# Altium PCB JacdacBreadboardBc30Mount 134 flex-hack-panel.PcbDoc
Units mm, origin at the board's own origin, x right, y up, seen from the top; angles counter-clockwise.
Board outline 74 x 77 mm, 2 copper layers (Top Layer, Bottom Layer), stack 1.971 mm thick; 4 components, 0 nets, 4 pads, 0 vias.
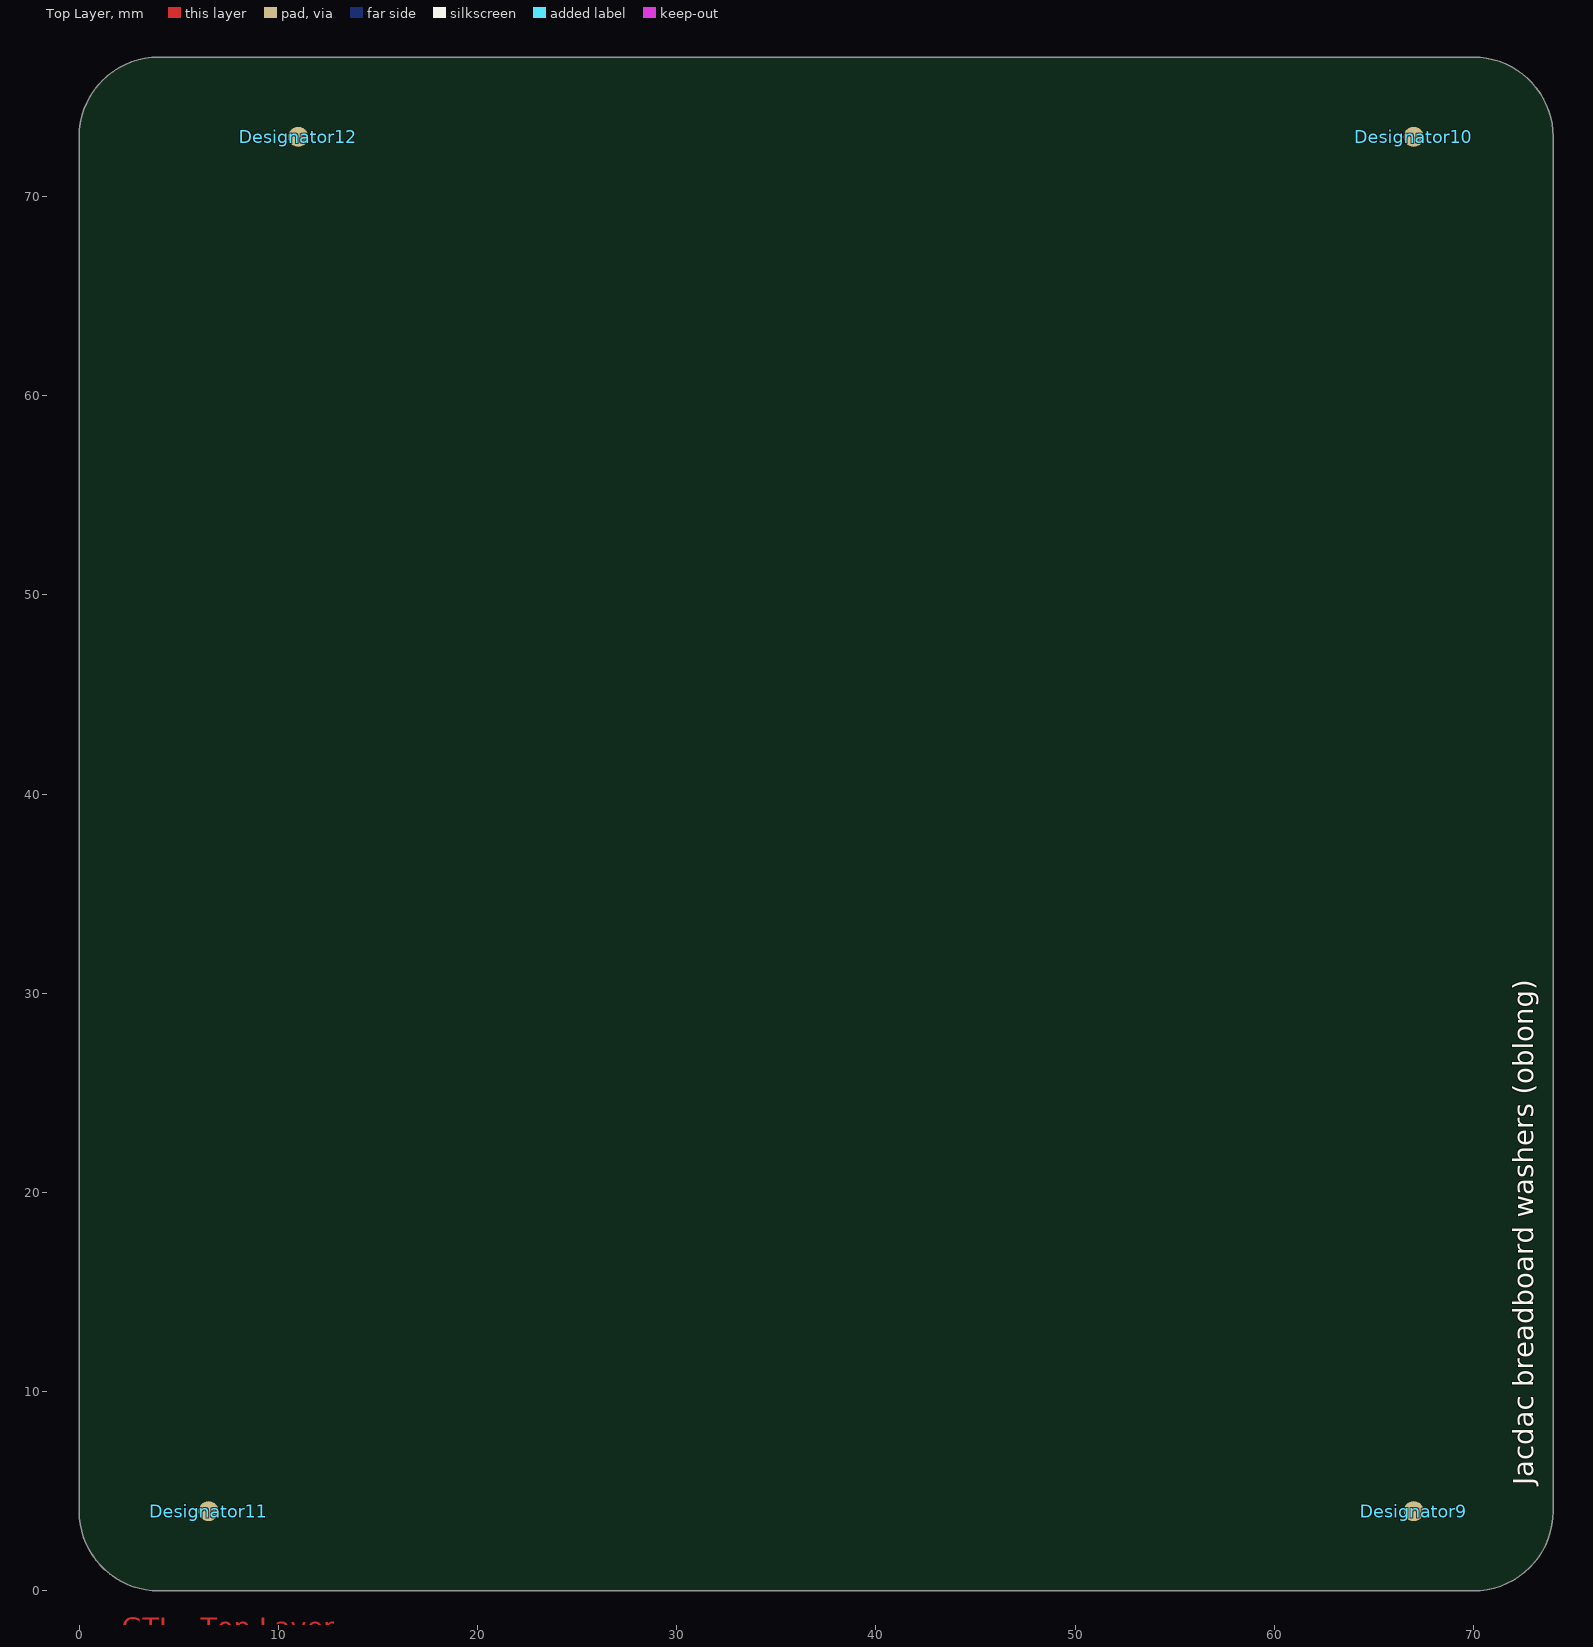
[diagram p0: Top Layer view]
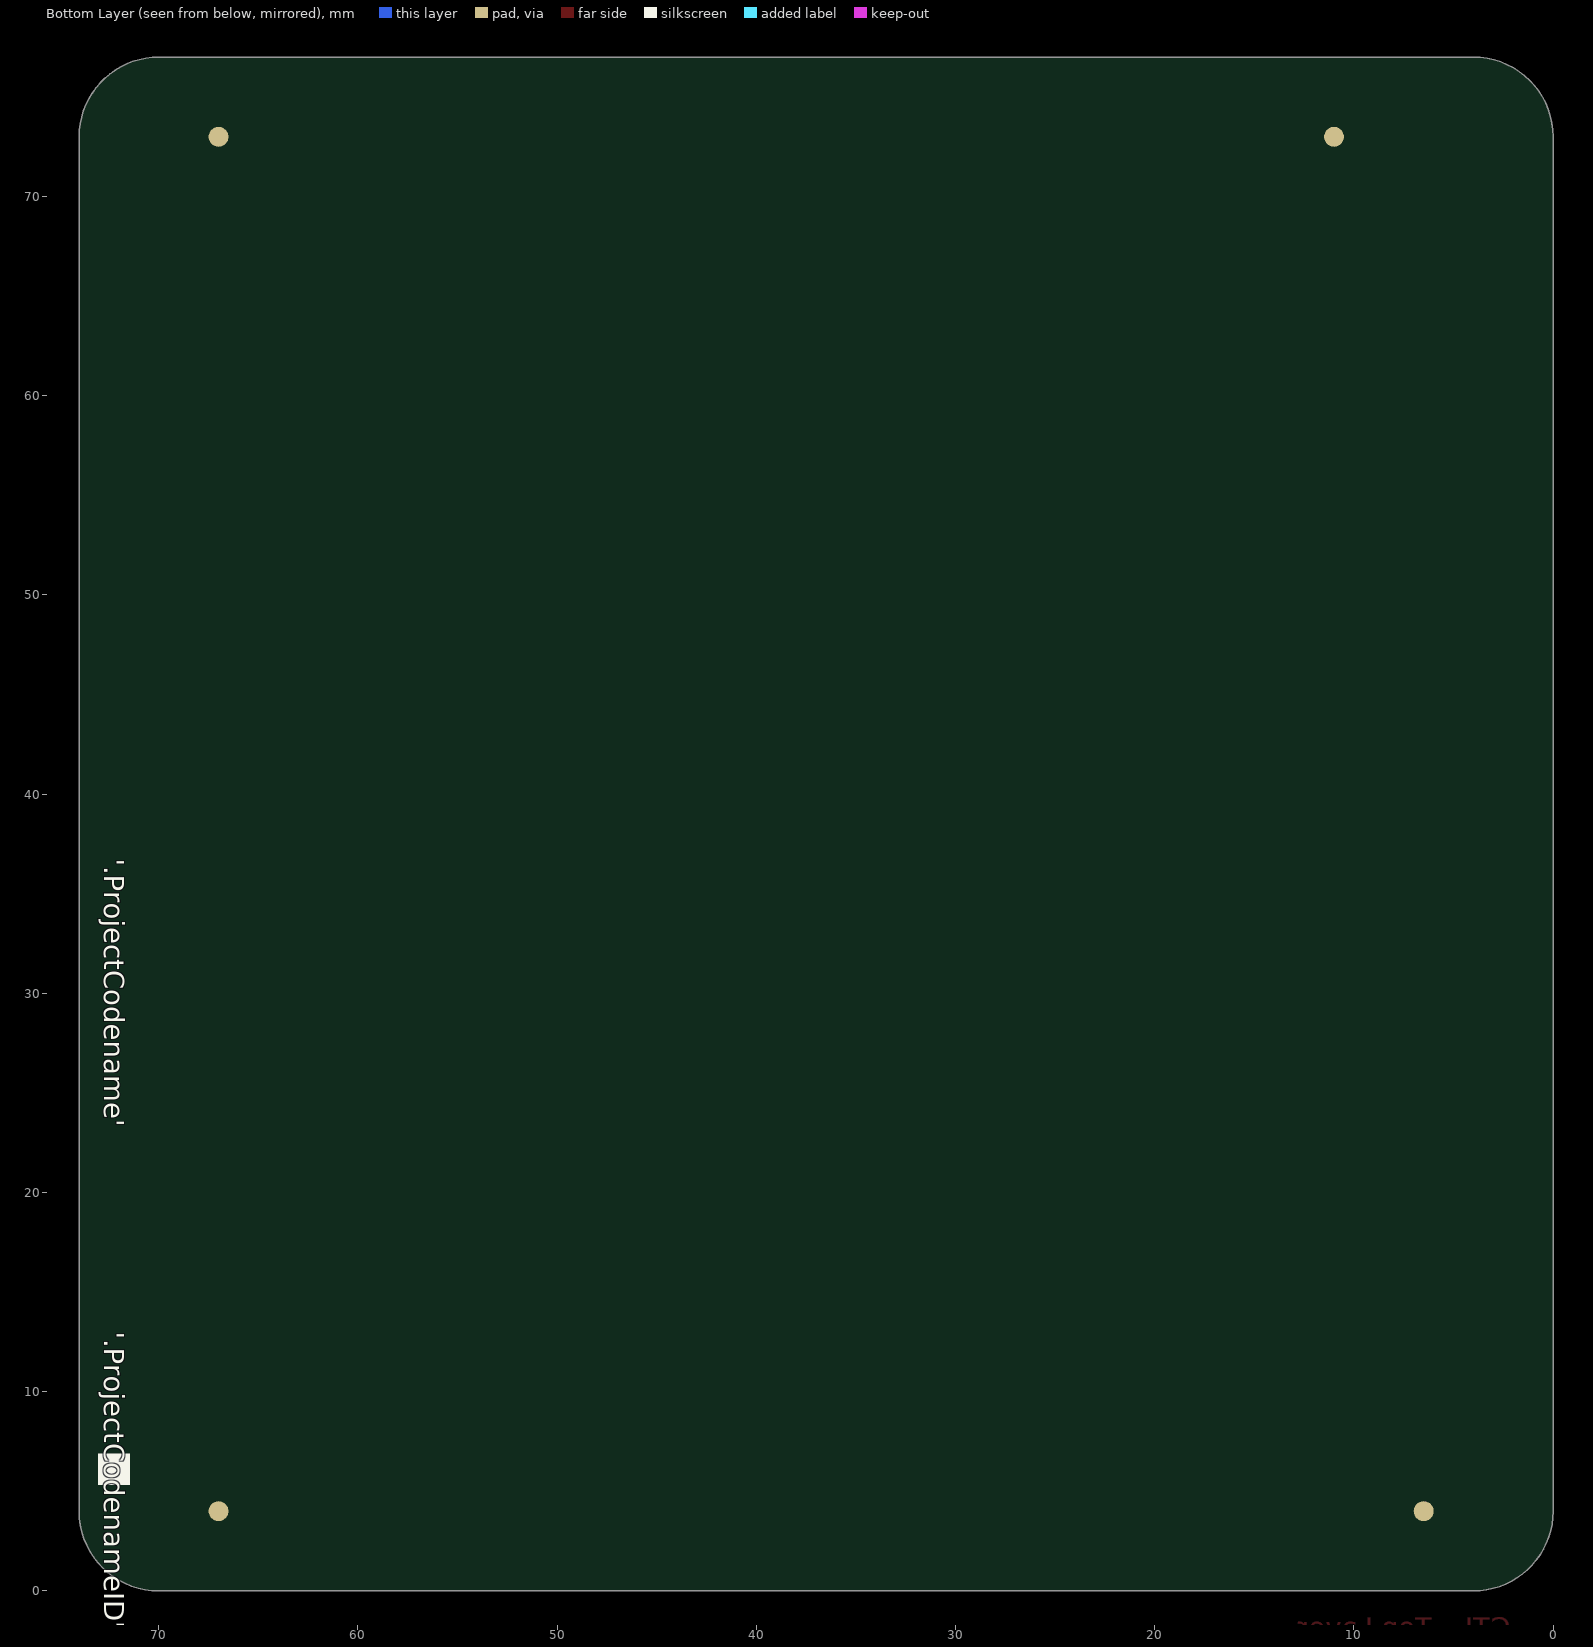
[diagram p1: Bottom Layer view, seen from below]

## Layer stack, top to bottom
Top Solder: solder mask 0.0102, Solder Resist, Dk 3.5
Top Layer: signal copper 0.0356
Dielectric 1: dielectric 1.9, FR-4, Dk 4.8
Bottom Layer: signal copper 0.0356
Bottom Solder: solder mask 0.0102, Solder Resist, Dk 3.5

## Board outline
0,4 ccw(c4,4) 4,0 70,0 ccw(c70,4) 74,4 74,73 ccw(c70,73) 70,77 4,77 ccw(c4,73) 0,73
cut-out: 6.397,4.5 ccw(c6.399,5.094) 6.4,4.5 cw(c6.404,8.9)
cut-out: 6.397,4.5 ccw(c6.399,5.094) 6.4,4.5 cw(c6.404,8.9)

## Design rules (kind name [scope] priority, off if disabled: settings)
Clearance [All] p1: gap=0.254 ignorepadtopadclearanceinfootprint=FALSE except(0: Arc-Hole Track-Hole SMDPad-Hole THPad-Hole Via-Hole Fill-Hole Poly-Hole Region-Hole Text-Hole)
PolygonConnect [All] p1: connectstyle=Relief reliefconductorwidth=0.254 reliefentries=4 polygonreliefangle="90 Angle" airgapwidth=0.254
RoutingVias [All] p1: holewidth=0.711 width=1.27 viastyle="Through Hole" minholewidth=0.711 minwidth=1.27 maxholewidth=0.711 maxwidth=1.27
SolderMaskExpansion [All] p1: expansion=0.102 istentingtop=FALSE
Width [All] p1: maxlimit=0.254 minlimit=0.254 preferedwidth=0.254
30 further rules are at their usual default settings.

## Components (designator, comment, footprint, x,y, rotation, side; value= is the part's Value field where it differs from the comment)
Designator9 "Comment" "Pad1mm soldermask2mm doublesided" 67,4 r0 top
Designator10 "Comment" "Pad1mm soldermask2mm doublesided" 67,73 r0 top
Designator11 "Comment" "Pad1mm soldermask2mm doublesided" 6.5,4 r180 top
Designator12 "Comment" "Pad1mm soldermask2mm doublesided" 11,73 r180 top

## Footprints (in the part's own frame and the unit in brackets; to place one, negate y for a bottom-side part, rotate by r counter-clockwise, add the part's x,y. Pads: shape width x height; smd on the part's side, far side on the other; paste and mask are expansions set on the pad)
"Pad1mm soldermask2mm doublesided" [mm] "Testpoint/fiducial pad 1mm diameter with 2mm diameter soldermask"
  round 1 all layers, no hole paste-1 mask+0.5: 1(0,0)

## Nets (pads, with @x,y where several pads share a name; then routed paths per layer and width w, separated by ;. In a path a pad name is that pad's centre, name@x,y a point inside that pad or via, vN(x,y) a via of type N, cw(c..) or ccw(c..) an arc to the next point about the centre after c; other vN are vias at no path point)
pads on no net: Designator9.1 Designator10.1 Designator11.1 Designator12.1

## Other copper
Top Layer:
  text "GTL - Top Layer" at 2.128,-2.651 h1.7
Bottom Layer:
  text "GBL - Bottom Layer" at 2.128,-4.151 h1.7

## Silkscreen, mask and mechanical layers (free items; w line width, h text height)
Top Overlay:
  text "Jacdac breadboard washers (oblong)" at 73,5.313 h1 r90
  text "GTO - Top Overlay" at 17.628,-5.687 h1.7
Bottom Overlay:
  region: 73.05,5.325 73.05,6.9 71.458,6.9 71.458,5.325
  text "'.ProjectCodename'" at 72.75,36.752 h1 r90
  text "'.ProjectCodenameID'-'.ProjectRevision'" at 72.75,13 h1 r90
  text "GBO - Bottom Overlay" at 17.628,-7.187 h1.7
Top Paste:
  text "GTP - Top Paste" at 31.828,-2.651 h1.7
Bottom Paste:
  text "GBP - Bottom Paste" at 31.828,-4.151 h1.7
Top Solder:
  text "GTS - Top Solder (resist)" at 31.828,-5.687 h1.7
Bottom Solder:
  text "GBS - Bottom Solder (resist)" at 31.828,-7.187 h1.7
Fabrication Notes [3]:
  text "Notes:" at 51.5,-4.33 h3
  text "GM3 - Fabrication Notes" at 2.128,-5.687 h1.7
  text "Copper up to cutout / edge at customer risk /  / V-score lines on GM9" at 59.5,-12.47 h2.3
Board Outline Only:
  the board outline again, w0.2
  text "GM6 - Board Outline Only" at 2.128,-7.186 h1.7
V Score [9]:
  lines w0.2: 5,0 5,77 ; 12.6,0 12.6,77 ; 19,0 19,77 ; 26.6,0 26.6,77 ; 33,0 33,77 ; 40.6,0 40.6,77 ; 47,0 47,77 ; 54.6,0 54.6,77 ; 61,0 61,77 ; 68.6,0 68.6,77
  text "GM9 - V Score" at 31.828,-8.65 h1.7
Board Outline [11]:
  the board outline again, w0.2
  text "GM11 - Board Outline + Cutouts" at 2.128,-8.686 h1.7
Top Assy [15]:
  text "GM15 - Top Assy" at 17.628,-2.655 h1.7
Bottom Assy [16]:
  text "GM16 - Bottom Assy" at 17.628,-4.155 h1.7

## Panel: embedded boards
"JacdacBreadboardBc30Mount 134 flex-hack.PcbDoc" at 5,7, 3 rows x 5 columns, spacing 23 x 14, rotation 0